# Altium PCB PCB1.PcbDoc
Units mil, origin at the board's own origin, x right, y up, seen from the top; angles counter-clockwise.
Board outline 6000 x 4000 mil, 2 copper layers (Top Layer, Bottom Layer); 1 components, 0 nets, 88 pads, 0 vias.
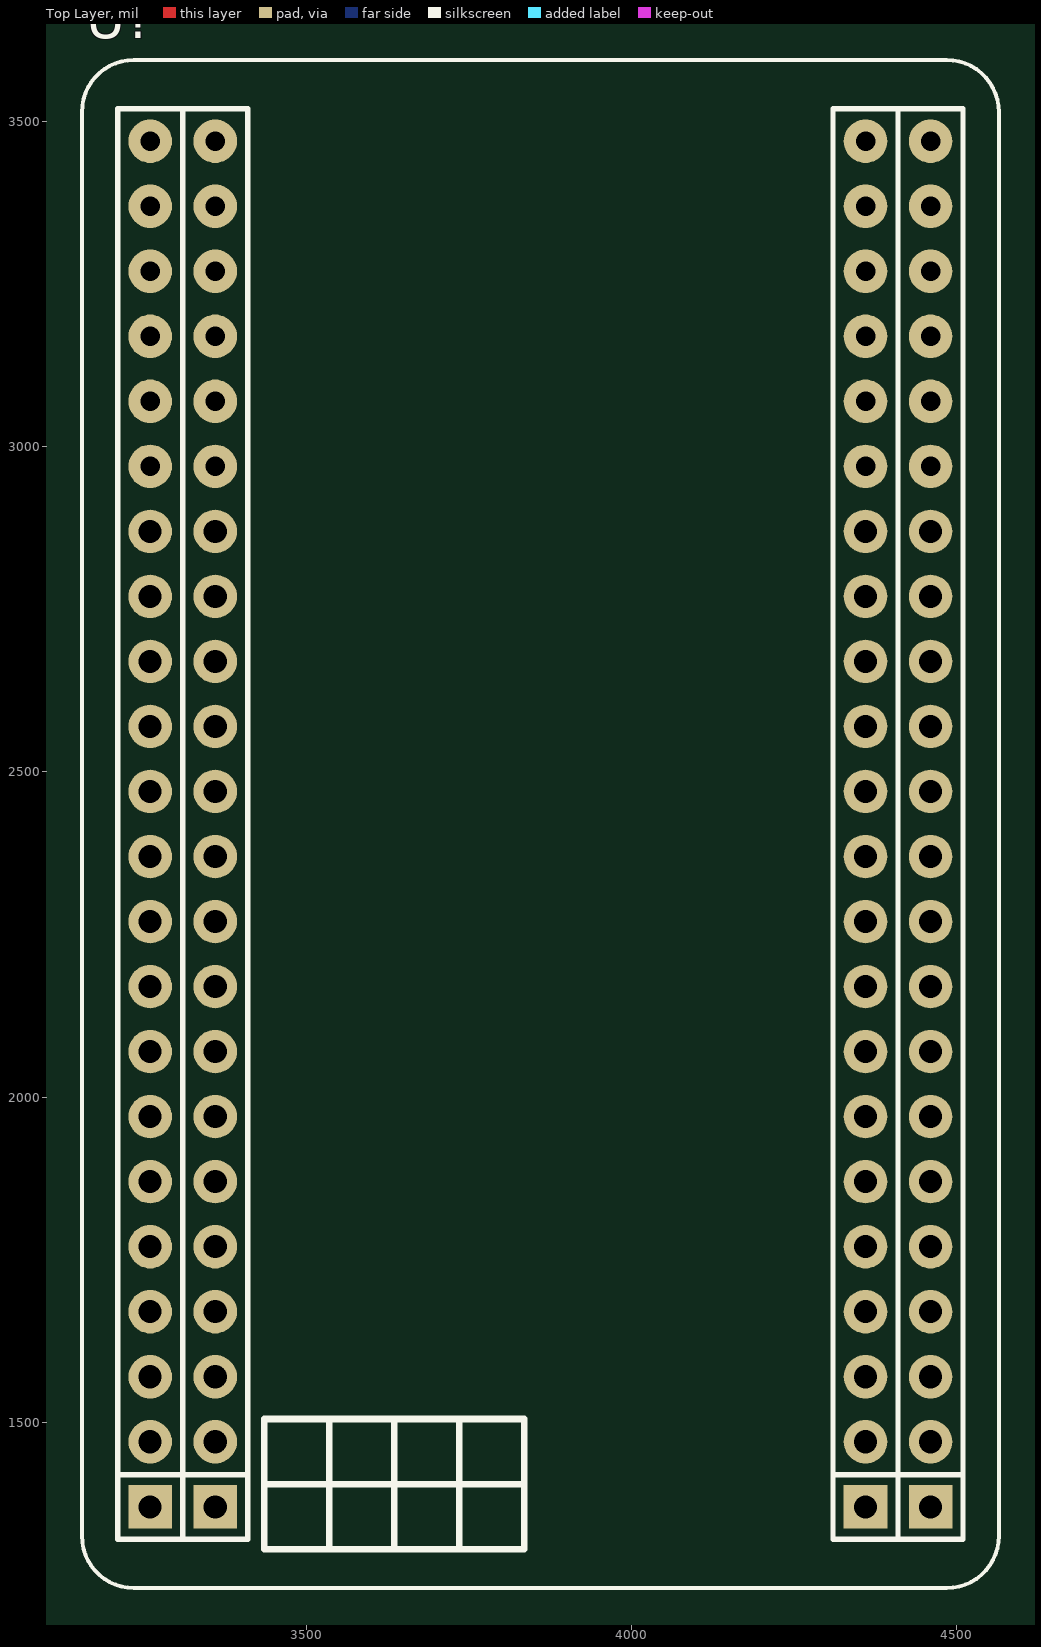
[diagram p0: Top Layer view]
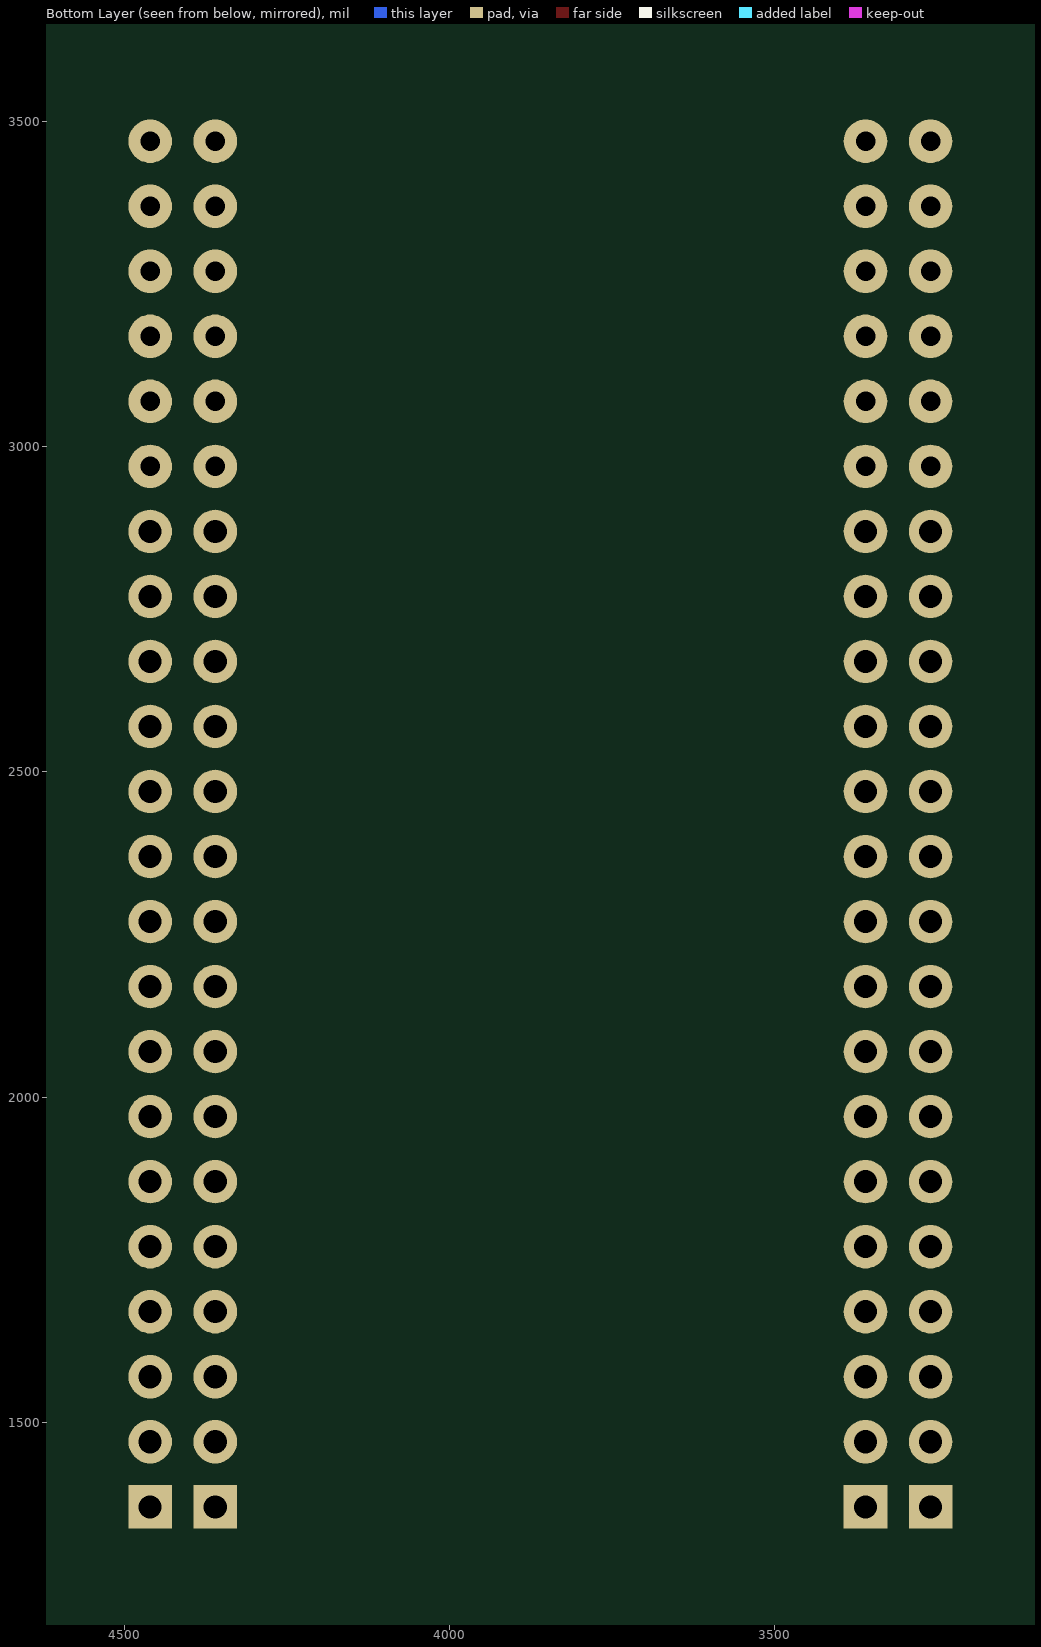
[diagram p1: Bottom Layer view, seen from below]

## Layer stack, top to bottom
Top Solder: solder mask 0.4, Solder Resist, Dk 3.5
Top Layer: signal copper 1.4
Dielectric 1: dielectric 12.6, FR-4, Dk 4.8
Bottom Layer: signal copper 1.4
Bottom Solder: solder mask 0.4, Solder Resist, Dk 3.5

## Board outline
1000,1000 7000,1000 7000,5000 1000,5000

## Design rules (kind name [scope] priority, off if disabled: settings)
Clearance [All] p1: gap=10 ignorepadtopadclearanceinfootprint=FALSE
PolygonConnect [All] p1: connectstyle=Relief reliefconductorwidth=10 reliefentries=4 polygonreliefangle="90 Angle" airgapwidth=10
RoutingVias [All] p1: holewidth=28 width=50 viastyle="Through Hole" minholewidth=28 minwidth=50 maxholewidth=28 maxwidth=50
SolderMaskExpansion [All] p1: expansion=4 istentingtop=FALSE
Width [All] p1: maxlimit=10 minlimit=10 preferedwidth=10
30 further rules are at their usual default settings.

## Components (designator, comment, footprint, x,y, rotation, side; value= is the part's Value field where it differs from the comment)
U? "H723核心板" H723核心板 3860,2320 r0 top

## Footprints (in the part's own frame and the unit in brackets; to place one, negate y for a bottom-side part, rotate by r counter-clockwise, add the part's x,y. Pads: shape width x height; smd on the part's side, far side on the other; paste and mask are expansions set on the pad)
H723核心板 [mm]
  round 1.7 hole 0.762: 1(-15.24,29.21) 2(-15.24,26.67) 3(-15.24,24.13) 4(-15.24,21.59) 5(-15.24,19.05) 6(-15.24,16.51) 39(-12.7,16.51) 40(-12.7,19.05) 41(-12.7,21.59) 42(-12.7,24.13) 43(-12.7,26.67) 44(-12.7,29.21) 45(12.7,29.21) 46(12.7,26.67) 47(12.7,24.13) 48(12.7,21.59) 49(12.7,19.05) 50(12.7,16.51) 83(15.24,16.51) 84(15.24,19.05) 85(15.24,21.59) 86(15.24,24.13) 87(15.24,26.67) 88(15.24,29.21)
  round 1.7 hole 0.9: 7(-15.24,13.97) 8(-15.24,11.43) 9(-15.24,8.89) 10(-15.24,6.35) 11(-15.24,3.81) 12(-15.24,1.27) 13(-15.24,-1.27) 14(-15.24,-3.81) 15(-15.24,-6.35) 16(-15.24,-8.89) 17(-15.24,-11.43) 18(-15.24,-13.97) 19(-15.24,-16.51) 20(-15.24,-19.05) 21(-15.24,-21.59) 24(-12.7,-21.59) 25(-12.7,-19.05) 26(-12.7,-16.51) 27(-12.7,-13.97) 28(-12.7,-11.43) 29(-12.7,-8.89) 30(-12.7,-6.35) 31(-12.7,-3.81) 32(-12.7,-1.27) 33(-12.7,1.27) 34(-12.7,3.81) 35(-12.7,6.35) 36(-12.7,8.89) 37(-12.7,11.43) 38(-12.7,13.97) 51(12.7,13.97) 52(12.7,11.43) 53(12.7,8.89) 54(12.7,6.35) 55(12.7,3.81) 56(12.7,1.27) 57(12.7,-1.27) 58(12.7,-3.81) 59(12.7,-6.35) 60(12.7,-8.89) 61(12.7,-11.43) 62(12.7,-13.97) 63(12.7,-16.51) 64(12.7,-19.05) 65(12.7,-21.59) 68(15.24,-21.59) 69(15.24,-19.05) 70(15.24,-16.51) 71(15.24,-13.97) 72(15.24,-11.43) 73(15.24,-8.89) 74(15.24,-6.35) 75(15.24,-3.81) 76(15.24,-1.27) 77(15.24,1.27) 78(15.24,3.81) 79(15.24,6.35) 80(15.24,8.89) 81(15.24,11.43) 82(15.24,13.97)
  rect 1.7x1.7 hole 0.9: 22(-15.24,-24.13) 23(-12.7,-24.13) 66(12.7,-24.13) 67(15.24,-24.13)
  silkscreen extent -17.91,-27.3 17.91,32.38, body extent -16.51,-25.4 16.51,30.48, height 8.5

## Nets (pads, with @x,y where several pads share a name; then routed paths per layer and width w, separated by ;. In a path a pad name is that pad's centre, name@x,y a point inside that pad or via, vN(x,y) a via of type N, cw(c..) or ccw(c..) an arc to the next point about the centre after c; other vN are vias at no path point)
pads on no net: U?.1 U?.2 U?.3 U?.4 U?.5 U?.6 U?.7 U?.8 U?.9 U?.10 U?.11 U?.12 U?.13 U?.14 U?.15 U?.16 U?.17 U?.18 U?.19 U?.20 U?.21 U?.22 U?.23 U?.24 U?.25 U?.26 U?.27 U?.28 U?.29 U?.30 U?.31 U?.32 U?.33 U?.34 U?.35 U?.36 U?.37 U?.38 U?.39 U?.40 U?.41 U?.42 U?.43 U?.44 U?.45 U?.46 U?.47 U?.48 U?.49 U?.50 U?.51 U?.52 U?.53 U?.54 U?.55 U?.56 U?.57 U?.58 U?.59 U?.60 U?.61 U?.62 U?.63 U?.64 U?.65 U?.66 U?.67 U?.68 U?.69 U?.70 U?.71 U?.72 U?.73 U?.74 U?.75 U?.76 U?.77 U?.78 U?.79 U?.80 U?.81 U?.82 U?.83 U?.84 U?.85 U?.86 U?.87 U?.88